# EAGLE board Brave Bojo (EAGLE 9.7.0)

Size 165.87 x 76.8 mm. Coordinates in mm from the lower left corner, seen from the top.
Outline: 0,0 165.87,0 165.87,76.8 0,76.8 0,0
Copper layers (1*16): Top 0.035mm / dielectric 1.5mm / Bottom 0.035mm
Design rules "default": minimum track width 6mil, minimum drill 0.35mm, track to track 6mil, track to pad 6mil, pad to pad 6mil, via to via 6mil, smd to smd 6mil, copper to edge 40mil, drill to drill 6mil, minimum pad ring 10mil, minimum via ring 8mil, stop-mask expansion 4mil, vias tented up to drill 0mil, thermal gap 10mil

## Footprints (pad centres in the part's own frame; a part is rotated, then mirrored left to right if it is on the bottom)
LED-RGB-5MM = drill 0.9: B 0.635,0.635; C -0.635,-0.635; G 1.905,-0.635; R -1.905,0.635
BATTERY-GENERIC = drill 1.118 pad 3.15 octagon: + 2.54,0; - -2.54,0
RESAD1016W63L850D250B = drill 0.83 pad 1.43: 1 -5.08,0; 2 5.08,0
SWITCH-SPDT-PTH-8.5X3.7MM = drill 1.016 pad 1.88: 1 -2.54,0; 2 0,0; 3 2.54,0
DIP762W53P254L1969H508Q14B = drill 0.743 pad 1.343: 1 -3.81,7.62; 2 -3.81,5.08; 3 -3.81,2.54; 4 -3.81,0; 5 -3.81,-2.54; 6 -3.81,-5.08; 7 -3.81,-7.62; 8 3.81,-7.62; 9 3.81,-5.08; 10 3.81,-2.54; 11 3.81,0; 12 3.81,2.54; 13 3.81,5.08; 14 3.81,7.62

## Placement (x,y rotation side)
D1  LED-RGBRCBG-PTH  [LED-RGB-5MM]  144.84,21.67 0 top
D2  LED-RGBRCBG-PTH  [LED-RGB-5MM]  160.08,21.67 0 top
P1  BATTERYGENERIC  [BATTERY-GENERIC]  8.26,68.54 180 top
R1  220  [RESAD1016W63L850D250B]  158.81,8.97 90 top
R2  220  [RESAD1016W63L850D250B]  143.57,8.97 90 top
R3  1k  [RESAD1016W63L850D250B]  59.75,26.75 90 top
R4  1k  [RESAD1016W63L850D250B]  74.99,26.75 90 top
S1  TOGGLE  [SWITCH-SPDT-PTH-8.5X3.7MM]  62.29,16.59 0 top
S2  TOGGLE  [SWITCH-SPDT-PTH-8.5X3.7MM]  77.53,16.59 0 top
U1  74HC00_PDIP  [DIP762W53P254L1969H508Q14B]  47.05,10.24 90 top
U2  74HC08_PDIP  [DIP762W53P254L1969H508Q14B]  123.25,10.24 90 top

## Library data of the parts
D1 D2 P1 R1-R4 S1 S2 U1 U2 = Tinkercad

## Nets
D1_C: D1.C R2.2
D2_C: D2.C R1.2
P1+: P1.+ R3.2 R4.2 U1.14 U2.14
P1-: P1.- R1.1 R2.1 S1.2 S2.2 U1.7 U2.7
U1_1A: R3.1 S1.1 U1.1 U1.2
U1_1Y: U1.3 U2.1 U2.4
U1_2A: R4.1 S2.1 U1.4 U1.5 U2.2 U2.12
U1_2Y: U1.6 U2.5 U2.9
U2_1Y: D2.B D2.G U2.3
U2_2Y: D1.G U2.6
U2_3Y: D1.B U2.8
U2_4B: U2.10 U2.13
U2_4Y: D1.R U2.11

## Tracks (layer width: path | path; a pad name or v marks a point on that pad's centre or on a via)
D1_C  (1 unrouted)
D2_C  (1 unrouted)
P1+  (4 unrouted)
P1-  (6 unrouted)
U1_1A  (3 unrouted)
U1_1Y  (2 unrouted)
U1_2A  (5 unrouted)
U1_2Y  (2 unrouted)
U2_1Y  (2 unrouted)
U2_2Y  (1 unrouted)
U2_3Y  (1 unrouted)
U2_4B  (1 unrouted)
U2_4Y  (1 unrouted)